# Altium PCB main.PcbDoc (part 5 of 8)
Units mil, origin at the board's own origin, x right, y up, seen from the top; angles counter-clockwise.
Board outline 3385.83 x 2362.2 mil, 8 copper layers (L1 (SIG), L2 (GND), L3 (SIG), L4 (GND), L5 (PWR), L6 (SIG), L7 (GND), L8 (SIG)), stack 46.958 mil thick; 318 components, 288 nets, 1482 pads, 1056 vias.
Unrouted connection lines stored in the file: 7.
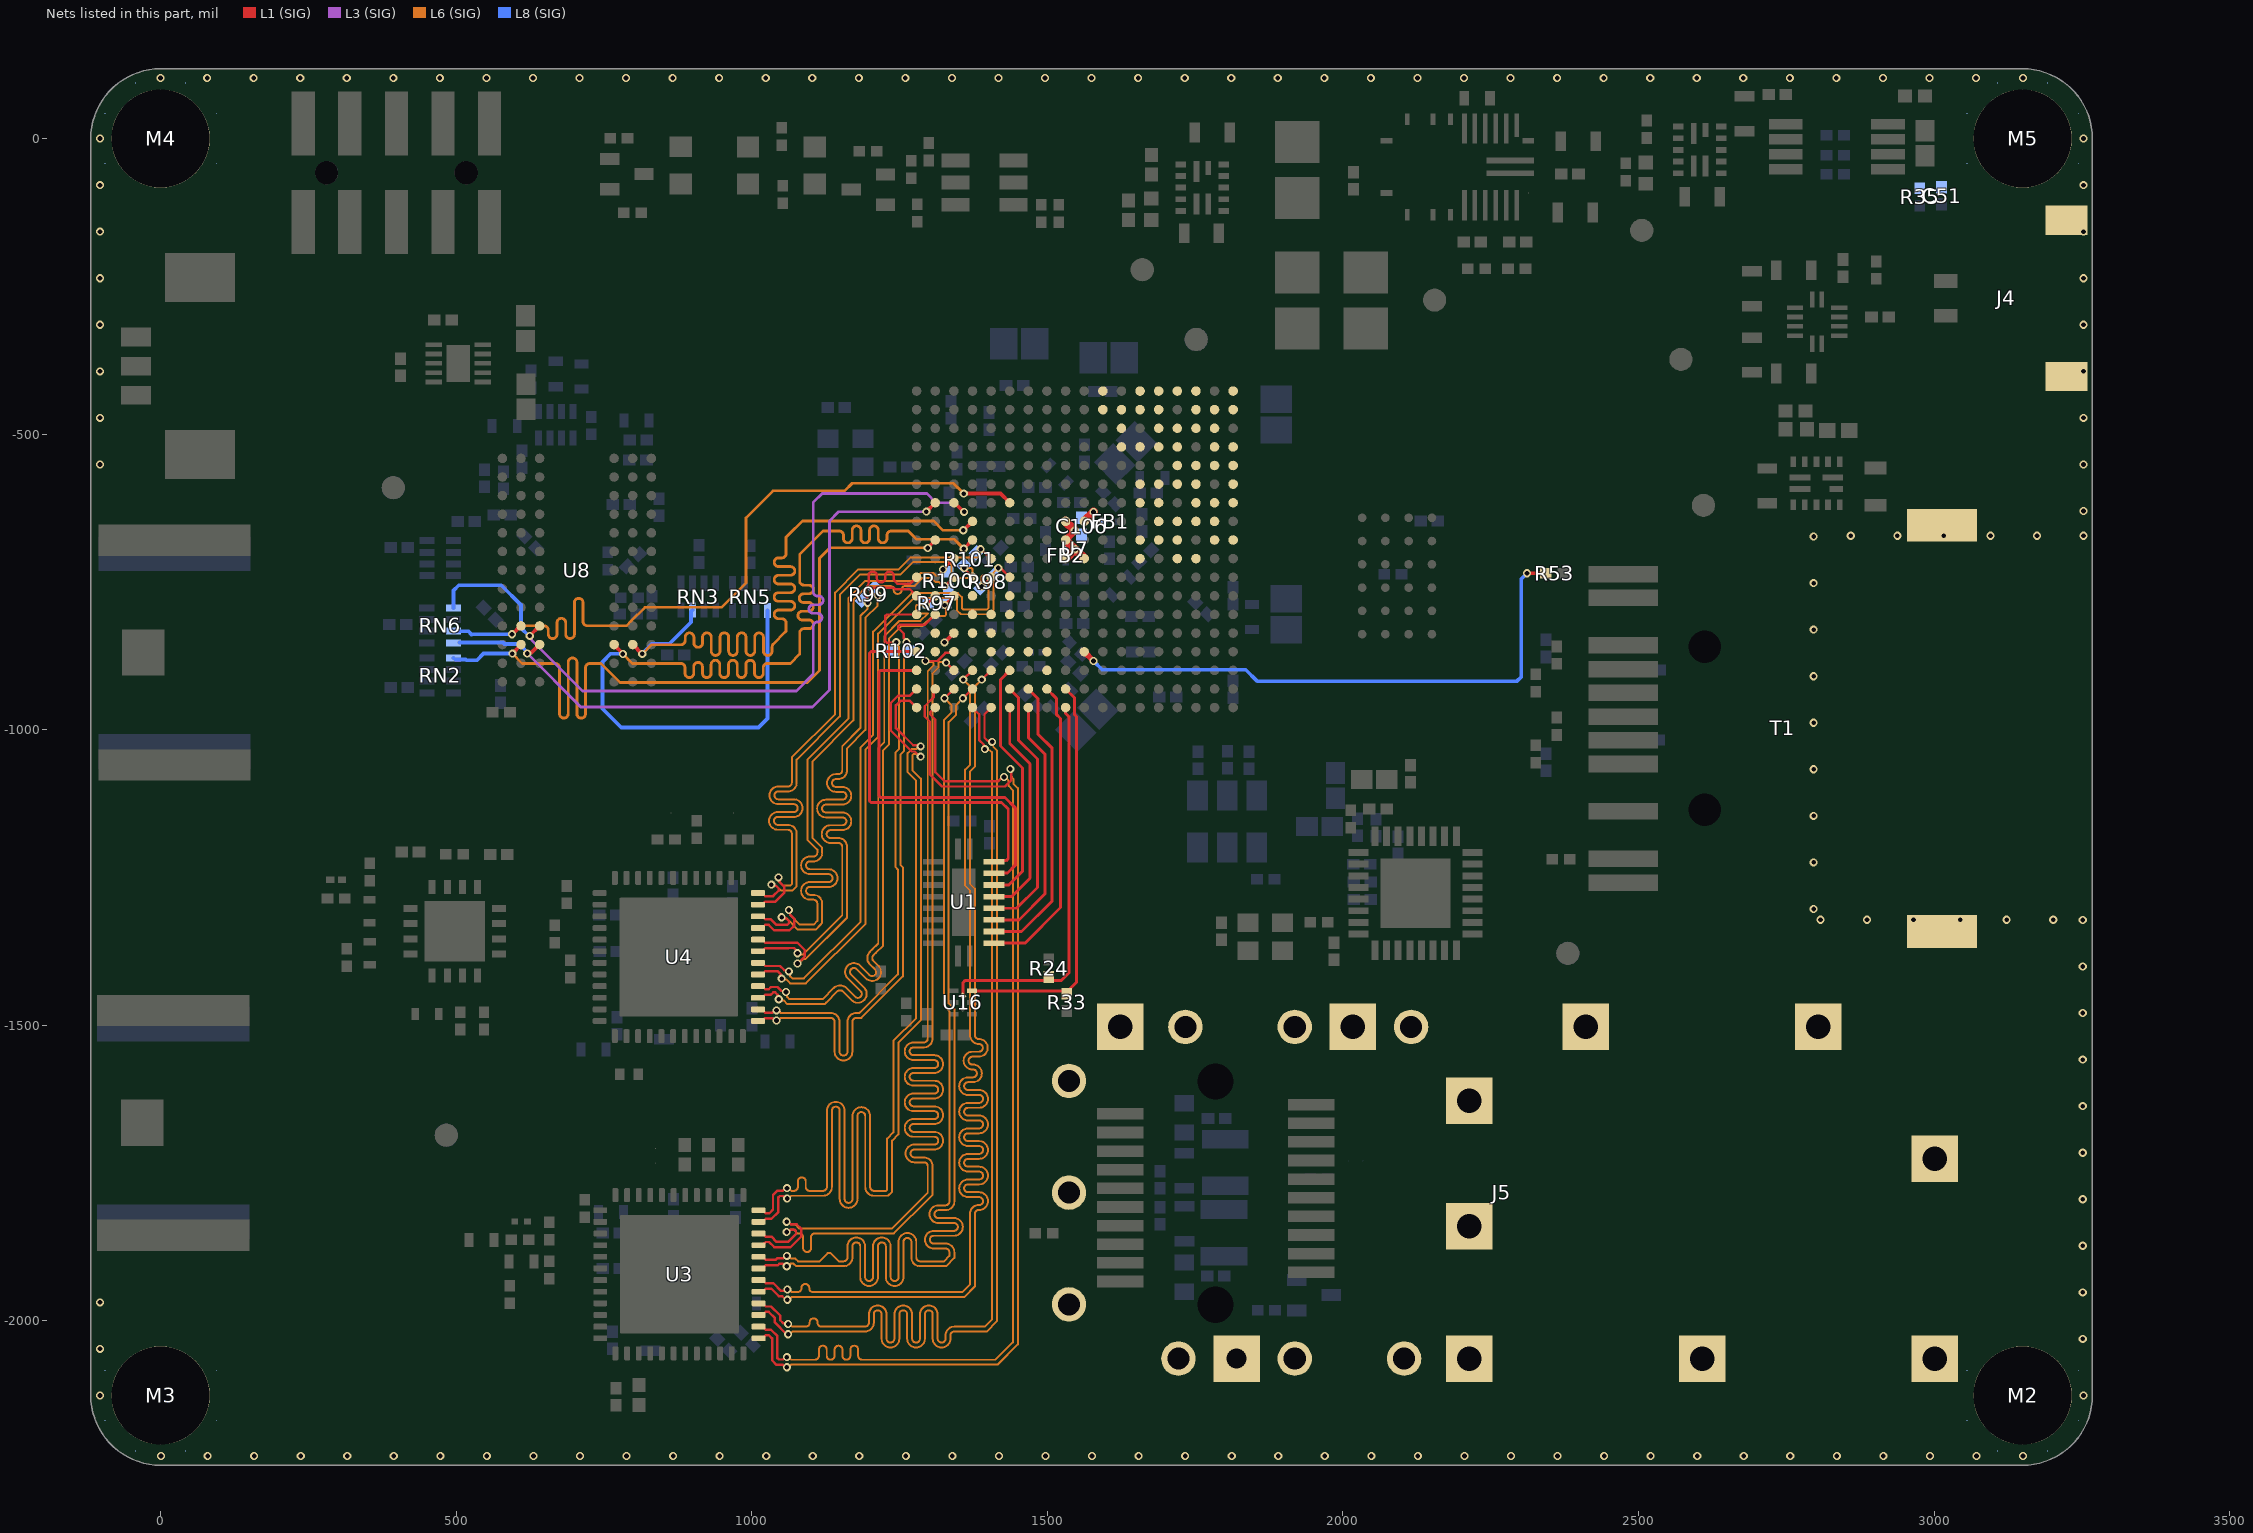
[diagram p9: the nets of this part, all layers, seen from the top]

## Via types
v1: diameter 13.78, hole 7.87, L1 (SIG) to L8 (SIG), tented both sides, 1033 vias
v2: diameter 13.78, hole 7.87, L1 (SIG) to L8 (SIG), 23 vias

## Nets (pads, with @x,y where several pads share a name; then routed paths per layer and width w, separated by ;. In a path a pad name is that pad's centre, name@x,y a point inside that pad or via, vN(x,y) a via of type N, cw(c..) or ccw(c..) an arc to the next point about the centre after c; other vN are vias at no path point) (continued)
AGND: C106.2 FB2.2 U7.H9 U7.J9 U7.K9 U7.K10 | length 112.5
  L1 (SIG) w12: U7.J9@1530.85,-679.01 1546.06,-663.8 1546.06,-662.56 v1@1545.95,-662.45
  L1 (SIG) w15: U7.H9@1530.6,-647.01 v1@1546.4,-662.8 ; U7.J9@1530.82,-679.23 1531.37,-679.23 1546.82,-694.67 v1(1546.93,-694.67) ; U7.K9@1530.85,-710.51 v1@1546.8,-694.58 ; v1@1546.87,-694.73 1562.34,-710.2 U7.K10@1562.34,-710.51
  other v1: 1546.4,-662.95
AVCC: C106.1 FB1.2 U7.H10 | length 22.3
  L1 (SIG) w15: U7.H10@1562.34,-647.52 v1(1578.09,-631.77)
B14_25: R53.1 U7.R10 | length 967.7
  L1 (SIG) w6: v1@2313.11,-733.86 2314.49,-735.25 2338.04,-735.25 R53.1@2338.14,-735.35
  L1 (SIG) w10: U7.R10@1562.34,-867.99 v1(1578.09,-883.74)
  L8 (SIG) w6: v1(1578.09,-883.74) 1592.95,-898.6 1835.65,-898.6 1854.7,-917.65 2294.4,-917.65 2301.92,-910.13 2301.92,-744.66 v1(2311.34,-735.25)
B15_0: U7.G13
B15_25: U7.K16
B15_L1_N: U7.C14
B15_L1_P: U7.D14
B15_L2_N: U7.B14
B15_L2_P: U7.B13
B15_L3_N: U7.B12
B15_L3_P: U7.C12
B15_L4_N: U7.A11
B15_L4_P: U7.B11
B15_L5_N: U7.F14
B15_L5_P: U7.F13
B15_L6_N: U7.D13 | length 0.2
  L1 (SIG) w10: U7.D13@1656.83,-521.53 U7.D13@1657.04,-521.53
B15_L6_P: U7.D12
B15_L7_N: U7.B17
B15_L7_P: U7.B16
B15_L8_N: U7.A16
B15_L8_P: U7.A15
B15_L9_N: U7.A14
B15_L9_P: U7.A13
B15_L10_N: U7.A18
B15_L10_P: U7.B18
B15_L11_N: U7.E16
B15_L11_P: U7.E15
B15_L12_N: U7.C15
B15_L12_P: U7.D15
B15_L13_N: U7.G16
B15_L13_P: U7.H16
B15_L14_N: U7.F16
B15_L14_P: U7.F15
B15_L15_N: U7.G14
B15_L15_P: U7.H14
B15_L16_N: U7.D17
B15_L16_P: U7.E17
B15_L17_N: U7.J13
B15_L17_P: U7.K13
B15_L18_N: U7.G17
B15_L18_P: U7.H17
B15_L19_N: U7.H15
B15_L19_P: U7.J14
B15_L20_N: U7.C17
B15_L20_P: U7.C16
B15_L21_N: U7.D18
B15_L21_P: U7.E18
B15_L22_N: U7.F18
B15_L22_P: U7.G18
B15_L23_N: U7.J18
B15_L23_P: U7.J17
B15_L24_N: U7.J15
B15_L24_P: U7.K15
B34_0: U7.K6
B34_25: U1.12 U7.U8 | length 516.6
  L1 (SIG) w5: U1.12@1409.93,-1360.98 1462.09,-1360.98 1522.28,-1300.8 1522.28,-980.99 1515.17,-973.88 1515.17,-946.8 U7.U8@1499.35,-930.98
B34_L1_N: R99.1 U4.44 U7.M1 | length 1078.2
  L1 (SIG) w4.11: U4.44@1010.54,-1354.91 1017.43,-1354.91 1020.3,-1357.78 1022.7,-1360.2 1058.03,-1360.2 1058.2,-1360.04 1077.05,-1360.04 1089.89,-1372.87 1089.89,-1383.18 1077.76,-1395.31 v1(1077.45,-1395.31) ; v1(1213.32,-772.78) 1212.41,-771.87 1203.99,-771.87 1200.88,-768.76 1200.88,-765.36 1206.51,-759.73 1240.3,-759.73 1242.87,-762.3 1267.68,-762.3 U7.M1@1278.88,-773.5
  L6 (SIG) w3.3: v1(1077.45,-1395.31) 1079.74,-1395.31 1086.97,-1388.08 1090.79,-1388.08 1161.33,-1317.54 1161.33,-1203.84 1161.33,-1198.04 ccw(c1146.38,-1198.04) 1146.38,-1183.09 1133.34,-1183.09 cw(c1133.34,-1176.44) 1126.69,-1176.44 cw(c1133.34,-1176.44) 1133.34,-1169.79 1153.33,-1169.79 ccw(c1153.33,-1154.84) 1168.28,-1154.84 ccw(c1153.33,-1154.84) 1153.33,-1139.89 1125.5,-1139.89 cw(c1125.5,-1133.25) 1118.85,-1133.25 cw(c1125.5,-1133.24) 1125.5,-1126.6 1153.33,-1126.6 ccw(c1153.33,-1111.65) 1168.28,-1111.65 ccw(c1153.33,-1111.65) 1153.33,-1096.7 1142.4,-1096.7 cw(c1142.4,-1090.05) 1135.75,-1090.05 cw(c1142.4,-1090.05) 1142.4,-1083.4 1146.38,-1083.4 ccw(c1146.38,-1068.45) 1161.33,-1068.45 1161.33,-1033.39 1161.33,-1031.24 1192.25,-1000.32 1192.25,-810.42 1212.79,-789.88 1212.79,-773.31 v1(1213.32,-772.78)
B34_L1_P: R99.2 U4.43 U7.L1 | length 1079.1
  L1 (SIG) w4.11: U4.43@1010.54,-1374.6 1017.43,-1374.6 U4.43@1020.3,-1371.73 ; U4.43@1020.3,-1371.71 1022.7,-1369.31 1061.8,-1369.31 1061.97,-1369.14 1071.28,-1369.14 1073.68,-1371.55 1073.68,-1371.65 1077.45,-1375.41 v1(1077.45,-1378.03) ; v1(1196.04,-785.22) 1195.13,-784.31 1195.13,-775.89 1191.77,-772.53 1191.77,-761.59 1192.02,-761.34 1194.09,-759.27 ccw(c1185.56,-750.77) 1197.6,-750.77 1197.6,-739.55 cw(c1204.65,-739.55) 1211.71,-739.55 1211.71,-743.57 ccw(c1218.76,-743.57) 1225.81,-743.57 1225.81,-739.55 cw(c1232.86,-739.55) 1239.92,-739.55 1239.92,-743.55 ccw(c1246.97,-743.55) 1241.98,-748.54 1246.64,-753.2 1267.68,-753.2 1271,-749.88 U7.L1@1278.88,-742
  L6 (SIG) w3.3: v1(1077.45,-1378.03) 1079.2,-1379.78 1087.35,-1379.78 1153.03,-1314.11 1153.03,-1203.84 1153.03,-1198.04 ccw(c1146.38,-1198.04) 1146.38,-1191.39 1133.34,-1191.39 cw(c1133.34,-1176.44) 1118.39,-1176.44 cw(c1133.34,-1176.44) 1133.34,-1161.49 1153.33,-1161.49 ccw(c1153.33,-1154.84) 1159.98,-1154.84 ccw(c1153.33,-1154.84) 1153.33,-1148.19 1125.5,-1148.19 cw(c1125.5,-1133.25) 1110.55,-1133.25 cw(c1125.5,-1133.24) 1125.5,-1118.3 1153.33,-1118.3 ccw(c1153.33,-1111.65) 1159.98,-1111.65 ccw(c1153.33,-1111.65) 1153.33,-1105 1142.4,-1105 cw(c1142.4,-1090.05) 1127.45,-1090.05 cw(c1142.4,-1090.05) 1142.4,-1075.1 1146.38,-1075.1 ccw(c1146.38,-1068.45) 1153.03,-1068.45 1153.03,-1033.39 1153.03,-1027.8 1183.95,-996.89 1183.95,-806.99 1195.8,-795.13 1195.8,-785.46 v1(1196.04,-785.22)
B34_L2_N: R100.2 U4.46 U7.L3 | length 1079.6
  L1 (SIG) w4.11: U4.46@1010.54,-1315.54 1017.43,-1315.54 U4.46@1020.3,-1318.41 ; U4.46@1020.3,-1318.43 1022.7,-1320.83 1032.28,-1320.83 1041.56,-1330.12 1060.04,-1330.12 1063.02,-1327.13 1063.02,-1323.73 1058.21,-1318.92 1052.43,-1318.92 v1(1050.58,-1317.07) ; v1(1326.12,-756.87) 1326.56,-756.87 1341.43,-742 U7.L3@1341.87,-742
  L6 (SIG) w3.3: v1(1050.58,-1317.07) 1052.48,-1318.97 1058.83,-1318.97 1077.77,-1337.91 1107.95,-1337.91 1116.25,-1329.6 1119.19,-1326.67 1119.19,-1294.13 ccw(c1104.24,-1294.13) 1104.24,-1279.18 1098.46,-1279.18 cw(c1098.46,-1272.53) 1091.81,-1272.53 cw(c1098.46,-1272.53) 1098.46,-1265.88 1130.02,-1265.88 ccw(c1130.02,-1250.93) 1144.97,-1250.93 ccw(c1130.02,-1250.93) 1130.02,-1235.98 1098.46,-1235.98 cw(c1098.46,-1229.33) 1091.81,-1229.33 cw(c1098.46,-1229.33) 1098.46,-1222.68 1104.24,-1222.68 ccw(c1104.24,-1207.73) 1119.19,-1207.73 1119.19,-1199.38 1105.54,-1185.73 1102.44,-1182.62 1102.44,-1053.81 1171.98,-984.27 1171.98,-780.28 1195.72,-756.54 1218.49,-756.54 1233.44,-756.54 cw(c1233.44,-763.19) 1240.09,-763.19 1240.09,-763.61 ccw(c1246.74,-763.61) 1246.74,-770.26 ccw(c1246.74,-763.61) 1253.39,-763.61 1253.39,-763.19 cw(c1260.04,-763.19) 1260.04,-756.54 1269.42,-756.54 1275.82,-756.54 1289.24,-743.13 1303.81,-743.13 1310.65,-749.97 1316.38,-749.97 1323.29,-756.87 v1(1326.12,-756.87)
B34_L2_P: R100.1 U4.45 U7.K3 | length 1081.8
  L1 (SIG) w4.11: U4.45@1010.54,-1335.23 1017.43,-1335.23 1020.3,-1332.36 1022.7,-1329.94 1028.51,-1329.94 1037.79,-1339.22 1063.81,-1339.22 1072.13,-1330.9 1072.13,-1319.96 1064.65,-1312.48 1064.65,-1306.7 v1(1062.8,-1304.85) ; v1(1323.43,-728.95) U7.K3@1341.87,-710.51
  L6 (SIG) w3.3: v1(1062.8,-1304.85) 1064.69,-1306.75 1064.69,-1313.1 1081.2,-1329.61 1104.51,-1329.61 1110.89,-1323.23 1110.89,-1294.13 ccw(c1104.24,-1294.13) 1104.24,-1287.48 1098.46,-1287.48 cw(c1098.46,-1272.53) 1083.51,-1272.53 cw(c1098.46,-1272.53) 1098.46,-1257.58 1130.02,-1257.58 ccw(c1130.02,-1250.93) 1136.67,-1250.93 ccw(c1130.02,-1250.93) 1130.02,-1244.28 1098.46,-1244.28 cw(c1098.46,-1229.33) 1083.51,-1229.33 cw(c1098.46,-1229.33) 1098.46,-1214.38 1104.24,-1214.38 ccw(c1104.24,-1207.73) 1110.89,-1207.73 1110.89,-1202.81 1094.14,-1186.06 1094.14,-1185.73 1094.14,-1050.38 1163.68,-980.83 1163.68,-776.85 1192.28,-748.25 1272.39,-748.25 1285.8,-734.83 1307.25,-734.83 1311.62,-739.2 1314.36,-739.2 1323.43,-730.13 v1(1323.43,-728.95)
B34_L3_N: R102.1 U4.38 U7.N1 | length 1077.7
  L1 (SIG) w4.11: U4.38@1010.54,-1473.02 1017.43,-1473.02 1020.3,-1475.89 1023.09,-1478.71 1035.06,-1478.71 1039.15,-1474.62 v1(1041.76,-1474.62) ; v1@1242.7,-852.48 1242.4,-852.78 1228.52,-852.78 1226.11,-850.37 1226.11,-807.4 1228.52,-805 U7.N1@1278.88,-805
  L6 (SIG) w3.3: v1(1041.76,-1474.62) 1044.45,-1474.62 1048.94,-1479.11 1088.28,-1479.11 1133.57,-1479.11 cw(c1133.57,-1494.06) 1148.52,-1494.06 1148.52,-1544.63 ccw(c1155.17,-1544.63) 1155.17,-1551.28 ccw(c1155.17,-1544.63) 1161.82,-1544.63 1161.82,-1494.06 cw(c1176.77,-1494.06) 1176.77,-1479.11 1181.82,-1479.11 1182.57,-1478.36 1247.27,-1413.66 1247.27,-1236.38 1243,-1232.12 1243,-1038.61 1248.92,-1032.69 1248.92,-859.21 1244.43,-854.72 v1(1244.43,-852.04)
B34_L3_P: R102.2 U4.37 U7.N2 | length 1080.4
  L1 (SIG) w4.11: U4.37@1010.54,-1492.71 1017.43,-1492.71 1022.33,-1487.81 1035.06,-1487.81 1039.15,-1491.9 v1(1041.76,-1491.9) ; v1(1261.71,-852.04) 1261.71,-849.42 1257.37,-845.08 1257.37,-837.62 1247.85,-828.1 1247.85,-824.7 1250.25,-822.3 1293.07,-822.3 U7.N2@1310.37,-805
  L6 (SIG) w3.3: v1(1041.76,-1491.9) 1044.45,-1491.9 1048.94,-1487.41 1088.28,-1487.41 1133.57,-1487.41 cw(c1133.57,-1494.06) 1140.22,-1494.06 1140.22,-1544.63 ccw(c1155.17,-1544.63) 1155.17,-1559.58 ccw(c1155.17,-1544.63) 1170.12,-1544.63 1170.12,-1494.06 cw(c1176.77,-1494.06) 1176.77,-1487.41 1182.57,-1487.41 1185.26,-1487.41 1255.57,-1417.1 1255.57,-1232.95 1251.3,-1228.68 1251.3,-1042.05 1257.22,-1036.13 1257.22,-859.21 1261.71,-854.72 v1(1261.71,-852.04)
B34_L4_N: R97.1 U4.40 U7.M2 | length 1078.4
  L1 (SIG) w4.11: U4.40@1010.54,-1433.65 1017.43,-1433.65 1020.3,-1436.52 1022.7,-1438.94 1028.68,-1438.94 1032.5,-1435.13 1043.5,-1435.13 1050.22,-1441.85 1056,-1441.85 v1(1057.85,-1443.7) ; v1(1294.95,-789.25) 1294.95,-789.08 1310.37,-773.66 U7.M2@1310.37,-773.5
  L6 (SIG) w3.3: v1(1057.85,-1443.7) 1059.75,-1445.6 1059.75,-1451.95 1063.54,-1455.74 1119.76,-1455.74 1138.78,-1436.72 cw(c1149.35,-1447.29) 1158.54,-1435.5 1158.7,-1435.5 1159.9,-1436.7 1174.75,-1451.55 ccw(c1179.45,-1446.85) 1184.15,-1451.55 ccw(c1179.45,-1446.85) 1184.15,-1442.15 1162.25,-1420.24 cw(c1172.82,-1409.67) 1162.22,-1399.14 1162.29,-1399.07 cw(c1172.82,-1409.67) 1183.39,-1399.1 1199.07,-1414.77 ccw(c1203.77,-1410.07) 1208.47,-1414.77 ccw(c1203.77,-1410.07) 1208.47,-1405.37 1199.87,-1396.77 cw(c1210.44,-1386.2) 1199.87,-1375.63 1203.97,-1371.53 1213.96,-1361.54 1213.96,-1031.33 1224.09,-1021.2 1224.09,-841.78 1249.92,-815.95 1285.28,-815.95 1297.81,-803.42 1279.3,-803.42 1277.37,-801.49 1277.37,-790.78 1279.3,-788.85 1293.01,-788.85 v1@1293.13,-788.72
B34_L4_P: R97.2 U4.39 U7.M3 | length 1079.6
  L1 (SIG) w4.11: U4.39@1010.54,-1453.34 1017.43,-1453.34 1020.3,-1450.47 1022.7,-1448.05 1032.45,-1448.05 1036.27,-1444.23 1039.73,-1444.23 1043.78,-1448.29 1043.78,-1454.07 v1(1045.63,-1455.92) ; v1(1326.32,-789.25) 1326.32,-789.15 1341.87,-773.6 U7.M3@1341.87,-773.5
  L6 (SIG) w3.3: v1(1045.63,-1455.92) 1047.53,-1457.82 1053.88,-1457.82 1060.1,-1464.04 1123.19,-1464.04 1125.63,-1461.6 1144.65,-1442.59 cw(c1149.35,-1447.29) 1154.07,-1442.6 1168.88,-1457.42 ccw(c1179.45,-1446.85) 1189.99,-1457.45 1190.06,-1457.38 ccw(c1179.45,-1446.85) 1190.02,-1436.28 1168.12,-1414.37 cw(c1172.82,-1409.67) 1168.12,-1404.97 cw(c1172.82,-1409.67) 1177.52,-1404.97 1193.2,-1420.64 ccw(c1203.77,-1410.07) 1214.3,-1420.68 1214.37,-1420.61 ccw(c1203.77,-1410.07) 1214.34,-1399.5 1205.74,-1390.9 cw(c1210.44,-1386.2) 1205.74,-1381.5 1209.84,-1377.39 1222.26,-1364.97 1222.26,-1034.77 1232.39,-1024.64 1232.39,-845.21 1253.36,-824.24 1288.72,-824.24 1305.75,-807.22 1326.76,-807.22 1328.69,-805.28 1328.69,-796.42 1328.33,-796.06 1328.33,-789.33 v1@1327.78,-788.78
B34_L5_N: R101.2 U4.48 U7.L4 | length 1081.5
  L1 (SIG) w4.11: U4.48@1010.54,-1276.17 1017.43,-1276.17 1020.3,-1279.04 1022.7,-1281.46 1036.12,-1281.46 1045.54,-1272.05 1045.54,-1268.65 1040.73,-1263.84 1034.94,-1263.84 v1(1033.09,-1261.99) ; v1(1359.54,-726.5) 1359.54,-727.34 1373.37,-741.17 U7.L4@1373.37,-742
  L6 (SIG) w3.3: v1(1033.09,-1261.99) 1034.99,-1263.88 1041.34,-1263.88 1049.05,-1271.59 1069.25,-1271.59 1076.04,-1264.8 1076.04,-1181.56 1076.04,-1175.76 ccw(c1061.09,-1175.76) 1061.09,-1160.81 1044.22,-1160.81 cw(c1044.22,-1154.16) 1037.57,-1154.16 cw(c1044.22,-1154.16) 1044.22,-1147.51 1071.09,-1147.51 ccw(c1071.09,-1132.56) 1086.04,-1132.56 ccw(c1071.09,-1132.56) 1071.09,-1117.61 1044.95,-1117.61 cw(c1044.95,-1110.96) 1038.3,-1110.96 cw(c1044.95,-1110.96) 1044.95,-1104.31 1061.09,-1104.31 ccw(c1061.09,-1089.36) 1076.04,-1089.36 1076.04,-1053.43 1076.04,-1050.33 1149.15,-977.22 1149.15,-771.35 1183.06,-737.43 1251.57,-737.43 1272.44,-716.57 1333.73,-716.57 1337.84,-720.68 1337.84,-734.9 1346.43,-743.49 1366.25,-743.49 1373.02,-736.72 1373.02,-728.12 1371.09,-726.18 1359.71,-726.18 v1@1359.55,-726.35
B34_L5_P: R101.1 U4.47 U7.K5 | length 1079.9
  L1 (SIG) w4.11: U4.47@1010.54,-1295.86 1017.43,-1295.86 1020.3,-1292.99 1022.7,-1290.57 1039.89,-1290.57 1054.64,-1275.82 1054.64,-1264.88 1047.16,-1257.4 1047.16,-1251.62 v1(1045.31,-1249.77) ; v1(1387.2,-694.67) 1388.12,-694.67 1403.95,-710.51 U7.K5@1404.86,-710.51
  L6 (SIG) w3.3: v1(1045.31,-1249.77) 1047.21,-1251.67 1047.21,-1258.02 1052.49,-1263.29 1065.81,-1263.29 1067.74,-1261.36 1067.74,-1181.56 1067.74,-1175.76 ccw(c1061.09,-1175.76) 1061.09,-1169.11 1044.22,-1169.11 cw(c1044.22,-1154.16) 1029.27,-1154.16 cw(c1044.22,-1154.16) 1044.22,-1139.21 1071.09,-1139.21 ccw(c1071.09,-1132.56) 1077.74,-1132.56 ccw(c1071.09,-1132.56) 1071.09,-1125.91 1044.95,-1125.91 cw(c1044.95,-1110.96) 1030,-1110.96 cw(c1044.95,-1110.96) 1044.95,-1096.01 1061.09,-1096.01 ccw(c1061.09,-1089.36) 1067.74,-1089.36 1067.74,-1053.43 1067.74,-1046.89 1140.85,-973.78 1140.85,-767.91 1179.63,-729.14 1248.13,-729.14 1269,-708.27 1342.98,-708.27 1382.17,-708.27 1386.41,-704.02 1386.41,-695.47 v1(1387.2,-694.67)
B34_L6_N: R98.1 U4.42 U7.L5 | length 1077.5
  L1 (SIG) w4.11: U4.42@1010.54,-1394.28 1017.43,-1394.28 1020.3,-1397.15 1022.7,-1399.57 1047.92,-1399.57 1055.16,-1406.81 1060.94,-1406.81 v1(1062.8,-1408.67) ; v1(1389.11,-757.75) U7.L5@1404.86,-742
  L6 (SIG) w3.3: v1(1062.8,-1408.67) 1064.69,-1410.56 1064.69,-1416.91 1068.49,-1420.71 1088.09,-1420.71 1184.13,-1324.66 1184.13,-1029.9 1205.32,-1008.71 1205.32,-834.04 1270.45,-768.91 1348.63,-768.91 1355.42,-775.7 1355.42,-794.36 1356.64,-795.58 1357.35,-796.3 1393.4,-796.3 1398.34,-796.3 1400.27,-794.36 1400.27,-742 1396.85,-738.58 1390.85,-738.58 1388.92,-740.51 1388.92,-756.16 v1@1388.07,-757.01
B34_L6_P: R98.2 U4.41 U7.L6 | length 1083
  L1 (SIG) w4.11: U4.41@1010.54,-1413.97 1017.43,-1413.97 1020.3,-1411.1 1022.7,-1408.68 1044.15,-1408.68 1048.73,-1413.25 1048.73,-1419.03 v1(1050.58,-1420.88) ; v1(1416.97,-726.28) 1418.83,-728.13 1422.49,-728.13 U7.L6@1436.36,-742
  L6 (SIG) w3.3: v1(1050.58,-1420.88) 1052.47,-1422.78 1058.82,-1422.78 1065.05,-1429 1091.53,-1429 1192.43,-1328.1 1192.43,-1033.34 1213.62,-1012.15 1213.62,-837.48 1273.89,-777.21 1345.19,-777.21 1347.12,-779.14 1347.12,-797.8 1353.92,-804.6 1401.78,-804.6 1408.57,-797.8 1408.57,-734.69 v1(1416.97,-726.28)
B34_L7_N: U3.48 U7.V1 | length 1803.7
  L1 (SIG) w4.11: U3.48@1011.46,-1812.75 1018.35,-1812.75 U3.48@1021.22,-1815.62 ; U3.48@1021.22,-1815.63 1023.62,-1818.04 1029.6,-1818.04 1035.88,-1811.76 1035.88,-1787.25 1043.62,-1779.51 1052.89,-1779.51 1057.06,-1775.35 v1(1059.68,-1775.35) ; U7.V1@1278.88,-962.48 1267.68,-951.28 1251.45,-951.28 1243.87,-958.85 1243.87,-997.13 1273.04,-1026.3 1283.75,-1026.3 v1(1285.6,-1028.15)
  L6 (SIG) w3.3: v1(1059.68,-1775.35) 1062.28,-1775.35 1066.85,-1779.91 1069.68,-1779.91 1071.33,-1779.91 ccw(c1071.33,-1773.26) 1077.98,-1773.26 1077.98,-1763.8 cw(c1084.63,-1763.8) 1084.63,-1757.15 cw(c1084.63,-1763.8) 1091.28,-1763.8 1091.28,-1773.26 ccw(c1097.93,-1773.26) 1097.93,-1779.91 1112.37,-1779.91 1114.02,-1779.91 1114.72,-1779.91 1120.52,-1779.91 ccw(c1120.52,-1773.26) 1127.17,-1773.26 1127.17,-1644.27 cw(c1142.12,-1644.27) 1142.12,-1629.32 cw(c1142.12,-1644.27) 1157.07,-1644.27 1157.07,-1793.67 ccw(c1163.72,-1793.67) 1163.72,-1800.32 ccw(c1163.72,-1793.67) 1170.37,-1793.67 1170.37,-1653.34 cw(c1185.31,-1653.34) 1185.31,-1638.39 cw(c1185.31,-1653.34) 1200.26,-1653.34 1200.26,-1773.26 ccw(c1206.91,-1773.26) 1206.91,-1779.91 1227.03,-1779.91 1228.32,-1778.62 1228.96,-1777.98 1228.96,-1691.48 1239.53,-1680.91 1239.53,-1526.23 1277.91,-1487.86 1277.91,-1086.13 1263.53,-1071.74 1263.53,-1039.44 1270.32,-1032.64 1278.42,-1032.64 1282.91,-1028.15 v1(1285.6,-1028.15)
B34_L7_P: U3.47 U7.U1 | length 1803.1
  L1 (SIG) w4.11: U3.47@1011.46,-1832.43 1018.35,-1832.43 1021.22,-1829.57 1023.62,-1827.14 1033.37,-1827.14 1044.99,-1815.53 1044.99,-1791.02 1047.39,-1788.62 1053.05,-1788.62 1057.22,-1792.78 v1(1059.84,-1792.78) ; U7.U1@1278.88,-930.98 1267.68,-942.18 1247.67,-942.18 1234.77,-955.08 1234.77,-1000.9 1270.68,-1036.81 1275.77,-1036.81 1284.39,-1045.43 v1(1285.6,-1045.43)
  L6 (SIG) w3.3: v1(1059.84,-1792.78) 1062.44,-1792.78 1067.01,-1788.21 1107.43,-1788.21 1114.72,-1788.21 1120.52,-1788.21 ccw(c1120.52,-1773.26) 1135.47,-1773.26 1135.47,-1644.27 cw(c1142.12,-1644.27) 1142.12,-1637.62 cw(c1142.12,-1644.27) 1148.77,-1644.27 1148.77,-1793.67 ccw(c1163.72,-1793.67) 1163.72,-1808.62 ccw(c1163.72,-1793.67) 1178.67,-1793.67 1178.67,-1653.34 cw(c1185.31,-1653.34) 1185.31,-1646.69 cw(c1185.31,-1653.34) 1191.96,-1653.34 1191.96,-1773.26 ccw(c1206.91,-1773.26) 1206.91,-1788.21 1228.32,-1788.21 1230.46,-1788.21 1237.26,-1781.42 1237.26,-1694.92 1247.83,-1684.34 1247.83,-1529.67 1286.21,-1491.29 1286.21,-1082.69 1271.82,-1068.31 1271.82,-1042.88 1273.76,-1040.94 1278.42,-1040.94 1282.91,-1045.43 v1(1285.6,-1045.43)
B34_L8_N: U3.44 U7.U3 | length 1802.8
  L1 (SIG) w4.11: U3.44@1011.46,-1891.49 1018.35,-1891.49 U3.44@1021.22,-1894.36 ; U3.44@1021.22,-1894.37 1023.62,-1896.78 1040.31,-1896.78 1042.99,-1894.1 1052.59,-1894.1 1056.76,-1889.93 v1(1059.38,-1889.93) ; v1(1326.12,-946.73) U7.U3@1341.87,-930.98
  L6 (SIG) w3.3: v1(1059.38,-1889.93) 1061.98,-1889.93 1066.55,-1894.51 1073.84,-1894.51 1078.46,-1899.12 1114.67,-1899.12 1128.38,-1885.41 1133.54,-1885.41 1147.25,-1899.12 1149.46,-1899.12 1152.9,-1899.12 1155.26,-1899.12 ccw(c1155.26,-1892.47) 1161.91,-1892.47 1161.91,-1873.73 cw(c1176.86,-1873.73) 1176.86,-1858.78 cw(c1176.86,-1873.73) 1191.81,-1873.73 1191.81,-1925.79 ccw(c1198.46,-1925.79) 1198.46,-1932.43 ccw(c1198.46,-1925.79) 1205.11,-1925.79 1205.11,-1873.73 cw(c1220.06,-1873.73) 1220.06,-1858.78 cw(c1220.06,-1873.73) 1235.01,-1873.73 1235.01,-1925.79 ccw(c1241.65,-1925.79) 1241.65,-1932.43 ccw(c1241.65,-1925.79) 1248.3,-1925.79 1248.3,-1866.32 cw(c1263.25,-1866.32) 1263.25,-1851.37 cw(c1263.25,-1866.32) 1278.2,-1866.32 1278.2,-1892.47 ccw(c1284.85,-1892.47) 1284.85,-1899.12 1317.87,-1899.12 1325.35,-1899.12 1334.42,-1890.05 1334.42,-1889.93 1334.42,-1884.13 ccw(c1327.77,-1884.13) 1327.77,-1877.48 1307.88,-1877.48 cw(c1307.88,-1862.54) 1292.93,-1862.54 cw(c1307.88,-1862.54) 1307.88,-1847.59 1342.05,-1847.59 ccw(c1342.05,-1840.94) 1348.7,-1840.94 ccw(c1342.05,-1840.94) 1342.05,-1834.29 1315.67,-1834.29 cw(c1315.67,-1819.34) 1300.72,-1819.34 cw(c1315.67,-1819.34) 1315.67,-1804.39 1327.77,-1804.39 ccw(c1327.77,-1797.74) 1334.42,-1797.74 1334.42,-1745.69 1334.42,-1475.95 1324.82,-1466.35 1324.82,-983.74 1337.5,-971.06 1337.5,-958.11 v1(1326.12,-946.73)
B34_L8_P: U3.43 U7.U4 | length 1805.7
  L1 (SIG) w4.11: U3.43@1011.46,-1911.17 1018.35,-1911.17 1021.22,-1908.31 1023.62,-1905.88 1044.08,-1905.88 1046.76,-1903.21 1052.41,-1903.21 1056.58,-1907.38 v1(1059.2,-1907.38) ; v1(1357.18,-946.73) 1357.4,-946.73 1373.14,-930.98 U7.U4@1373.37,-930.98
  L6 (SIG) w3.3: v1(1059.2,-1907.38) 1061.8,-1907.38 1066.37,-1902.81 1070.41,-1902.81 1075.02,-1907.42 1149.46,-1907.42 1155.26,-1907.42 ccw(c1155.26,-1892.47) 1170.21,-1892.47 1170.21,-1873.73 cw(c1176.86,-1873.73) 1176.86,-1867.08 cw(c1176.86,-1873.73) 1183.51,-1873.73 1183.51,-1925.79 ccw(c1198.46,-1925.79) 1198.46,-1940.73 ccw(c1198.46,-1925.79) 1213.41,-1925.79 1213.41,-1873.73 cw(c1220.06,-1873.73) 1220.06,-1867.08 cw(c1220.06,-1873.73) 1226.71,-1873.73 1226.71,-1925.79 ccw(c1241.65,-1925.79) 1241.65,-1940.73 ccw(c1241.65,-1925.79) 1256.6,-1925.79 1256.6,-1866.32 cw(c1263.25,-1866.32) 1263.25,-1859.67 cw(c1263.25,-1866.32) 1269.9,-1866.32 1269.9,-1892.47 ccw(c1284.85,-1892.47) 1284.85,-1907.42 1317.87,-1907.42 1328.79,-1907.42 1342.72,-1893.49 1342.72,-1889.93 1342.72,-1884.13 ccw(c1327.77,-1884.13) 1327.77,-1869.19 1307.88,-1869.19 cw(c1307.88,-1862.54) 1301.23,-1862.54 cw(c1307.88,-1862.54) 1307.88,-1855.89 1342.05,-1855.89 ccw(c1342.05,-1840.94) 1357,-1840.94 ccw(c1342.05,-1840.94) 1342.05,-1825.99 1315.67,-1825.99 cw(c1315.67,-1819.34) 1309.02,-1819.34 cw(c1315.67,-1819.34) 1315.67,-1812.69 1327.77,-1812.69 ccw(c1327.77,-1797.74) 1342.72,-1797.74 1342.72,-1745.69 1342.72,-1472.51 1333.12,-1462.91 1333.12,-987.18 1345.8,-974.5 1345.8,-958.11 v1(1357.18,-946.73)
B34_L9_N: U3.38 U7.V2 | length 1804.8
  L1 (SIG) w4.11: U3.38@1011.46,-2009.6 1018.35,-2009.6 U3.38@1021.22,-2012.47 ; U3.38@1021.22,-2012.48 1023.62,-2014.89 1032.6,-2014.89 1043.46,-2025.76 1043.46,-2062.81 1045.87,-2065.22 1052.67,-2065.22 1056.76,-2061.13 v1(1059.38,-2061.13) ; U7.V2@1310.37,-962.48 1309.56,-962.48 1301.61,-970.43 1301.61,-973.83 1310.37,-982.6 1310.37,-1071.62 1325.57,-1086.82 1417.17,-1086.82 1424.11,-1079.88 v1(1426.73,-1079.88)
  L6 (SIG) w3.3: v1(1059.38,-2061.13) 1062.06,-2061.13 1066.55,-2065.62 1105.21,-2065.62 1106.86,-2065.62 ccw(c1106.86,-2058.97) 1113.51,-2058.97 1113.51,-2048.49 cw(c1120.16,-2048.49) 1120.16,-2041.84 cw(c1120.16,-2048.49) 1126.81,-2048.49 1126.81,-2058.97 ccw(c1133.46,-2058.97) 1133.46,-2065.62 ccw(c1133.46,-2058.97) 1140.11,-2058.97 1140.11,-2048.49 cw(c1146.76,-2048.49) 1146.76,-2041.84 cw(c1146.76,-2048.49) 1153.41,-2048.49 1153.41,-2058.97 ccw(c1160.06,-2058.97) 1160.06,-2065.62 ccw(c1160.06,-2058.97) 1166.71,-2058.97 1166.71,-2048.49 cw(c1173.36,-2048.49) 1173.36,-2041.84 cw(c1173.36,-2048.49) 1180,-2048.49 1180,-2058.97 ccw(c1186.65,-2058.97) 1186.65,-2065.62 1201.06,-2065.62 1412.22,-2065.62 1441.76,-2036.08 1441.76,-1102.32 1434.34,-1094.9 1434.34,-1086.29 1427.93,-1079.88 v1(1426.73,-1079.88)
B34_L9_P: U3.37 U7.U2 | length 1805.5
  L1 (SIG) w4.11: U3.37@1011.46,-2029.28 1018.35,-2029.28 1021.22,-2026.42 1023.62,-2023.99 1028.82,-2023.99 1034.36,-2029.53 1034.36,-2066.58 1042.1,-2074.32 1052.67,-2074.32 1056.76,-2078.41 v1(1059.38,-2078.41) ; U7.U2@1310.37,-930.98 1308.07,-933.28 1308.07,-944.75 1292.5,-960.32 1292.5,-977.6 1301.27,-986.37 1301.27,-1075.4 1321.8,-1095.93 1428.28,-1095.93 1439.17,-1085.03 1439.17,-1068.06 v1(1437.4,-1066.28)
  L6 (SIG) w3.3: v1(1059.38,-2078.41) 1062.06,-2078.41 1066.55,-2073.92 1125.12,-2073.92 1179.17,-2073.92 1415.65,-2073.92 1450.06,-2039.52 1450.06,-1979.47 1450.06,-1098.88 1442.64,-1091.46 1442.64,-1082.85 1438.77,-1078.98 1438.77,-1067.66 v1(1437.4,-1066.28)
B34_L10_N: U3.40 U7.V4 | length 1801.9
  L1 (SIG) w4.11: U3.40@1011.46,-1970.23 1018.35,-1970.23 1021.22,-1973.1 1023.62,-1975.52 1032.6,-1975.52 1048.17,-1991.09 1048.17,-1998.82 1052.88,-2003.54 1059.91,-2003.54 v1(1061.52,-2005.15) ; U7.V4@1373.37,-962.48 1384.56,-973.67 1384.56,-1017.2 1392.5,-1025.14 1392.5,-1030.92 v1(1394.35,-1032.77)
  L6 (SIG) w3.3: v1(1061.52,-2005.15) 1064.2,-2005.15 1068.69,-2009.64 1089.69,-2009.64 1091.35,-2009.64 ccw(c1091.35,-2002.99) 1097.99,-2002.99 1097.99,-2002.19 cw(c1104.64,-2002.19) 1104.64,-1995.54 cw(c1104.64,-2002.19) 1111.29,-2002.19 1111.29,-2002.99 ccw(c1117.94,-2002.99) 1117.94,-2009.64 1140.69,-2009.64 1185.65,-2009.64 1191.45,-2009.64 ccw(c1191.45,-2002.99) 1198.1,-2002.99 1198.1,-1988.68 cw(c1213.05,-1988.68) 1213.05,-1973.73 cw(c1213.05,-1988.68) 1227.99,-1988.68 1227.99,-2029.93 ccw(c1234.64,-2029.93) 1234.64,-2036.58 ccw(c1234.64,-2029.93) 1241.29,-2029.93 1241.29,-1988.68 cw(c1256.24,-1988.68) 1256.24,-1973.73 cw(c1256.24,-1988.68) 1271.19,-1988.68 1271.19,-2029.93 ccw(c1277.84,-2029.93) 1277.84,-2036.58 ccw(c1277.84,-2029.93) 1284.49,-2029.93 1284.49,-1988.68 cw(c1299.44,-1988.68) 1299.44,-1973.73 cw(c1299.44,-1988.68) 1314.39,-1988.68 1314.39,-2029.93 ccw(c1321.04,-2029.93) 1321.04,-2036.58 ccw(c1321.04,-2029.93) 1327.69,-2029.93 1327.69,-2024.59 cw(c1342.64,-2024.59) 1342.64,-2009.64 1380.49,-2009.64 1393.8,-2009.64 1406.39,-1997.05 1406.39,-1038.46 1402.6,-1034.67 1396.25,-1034.67 v1(1394.35,-1032.77)
B34_L10_P: U3.39 U7.V5 | length 1801.6
  L1 (SIG) w4.11: U3.39@1011.46,-1989.91 1018.35,-1989.91 1021.22,-1987.05 1023.62,-1984.62 1028.82,-1984.62 1039.06,-1994.86 1039.06,-2002.59 1058.9,-2022.43 v1(1061.52,-2022.43) ; U7.V5@1404.86,-962.48 1393.67,-973.67 1393.67,-1013.43 1398.94,-1018.7 1404.72,-1018.7 v1(1406.57,-1020.55)
  L6 (SIG) w3.3: v1(1061.52,-2022.43) 1064.2,-2022.43 1068.69,-2017.94 1185.65,-2017.94 1191.45,-2017.94 ccw(c1191.45,-2002.99) 1206.4,-2002.99 1206.4,-1988.68 cw(c1213.05,-1988.68) 1213.05,-1982.03 cw(c1213.05,-1988.68) 1219.7,-1988.68 1219.7,-2029.93 ccw(c1234.64,-2029.93) 1234.64,-2044.88 ccw(c1234.64,-2029.93) 1249.59,-2029.93 1249.59,-1988.68 cw(c1256.24,-1988.68) 1256.24,-1982.03 cw(c1256.24,-1988.68) 1262.89,-1988.68 1262.89,-2029.93 ccw(c1277.84,-2029.93) 1277.84,-2044.88 ccw(c1277.84,-2029.93) 1292.79,-2029.93 1292.79,-1988.68 cw(c1299.44,-1988.68) 1299.44,-1982.03 cw(c1299.44,-1988.68) 1306.09,-1988.68 1306.09,-2029.93 ccw(c1321.04,-2029.93) 1321.04,-2044.88 ccw(c1321.04,-2029.93) 1335.99,-2029.93 1335.99,-2024.59 cw(c1342.64,-2024.59) 1342.64,-2017.94 1380.49,-2017.94 1397.24,-2017.94 1414.69,-2000.49 1414.69,-1035.02 1408.47,-1028.8 1408.47,-1022.45 v1(1406.57,-1020.55)
B34_L11_N: U3.46 U7.T3 | length 1800.9
  L1 (SIG) w4.11: U3.46@1011.46,-1852.12 1018.35,-1852.12 1021.22,-1854.99 1023.62,-1857.41 1033.2,-1857.41 1042.05,-1866.26 1061.45,-1866.26 1074.84,-1852.87 1074.84,-1847.86 1072.44,-1845.46 1065.63,-1845.46 1061.55,-1849.54 v1(1058.93,-1849.54) ; v1(1328.8,-886.42) U7.T3@1341.87,-899.48
  L6 (SIG) w3.3: v1(1058.93,-1849.54) 1061.61,-1849.54 1065.29,-1845.87 1066.1,-1845.05 1070.31,-1845.05 1077.23,-1851.98 1080.24,-1851.98 cw(c1080.24,-1858.63) 1086.88,-1858.63 1086.88,-1876.78 ccw(c1093.53,-1876.78) 1093.53,-1883.43 ccw(c1093.53,-1876.78) 1100.18,-1876.78 1100.18,-1858.63 cw(c1106.83,-1858.63) 1106.83,-1851.98 1125.38,-1851.98 1240.51,-1851.98 1301.09,-1791.4 1305.95,-1786.54 1305.95,-1738.26 ccw(c1291,-1738.26) 1291,-1723.31 1275.18,-1723.31 cw(c1275.18,-1716.66) 1268.53,-1716.66 cw(c1275.18,-1716.66) 1275.18,-1710.01 1308.79,-1710.01 ccw(c1308.79,-1695.06) 1323.74,-1695.06 ccw(c1308.79,-1695.06) 1308.79,-1680.11 1273.71,-1680.11 cw(c1273.71,-1673.46) 1267.06,-1673.46 cw(c1273.71,-1673.46) 1273.71,-1666.81 1308.79,-1666.81 ccw(c1308.79,-1651.86) 1323.74,-1651.86 ccw(c1308.79,-1651.86) 1308.79,-1636.91 1273.71,-1636.91 cw(c1273.71,-1630.26) 1267.06,-1630.26 cw(c1273.71,-1630.26) 1273.71,-1623.61 1308.79,-1623.61 ccw(c1308.79,-1608.67) 1323.74,-1608.67 ccw(c1308.79,-1608.67) 1308.79,-1593.72 1273.71,-1593.72 cw(c1273.71,-1587.07) 1267.06,-1587.07 cw(c1273.71,-1587.07) 1273.71,-1580.42 1308.79,-1580.42 ccw(c1308.79,-1565.47) 1323.74,-1565.47 ccw(c1308.79,-1565.47) 1308.79,-1550.52 1273.71,-1550.52 cw(c1273.71,-1543.87) 1267.06,-1543.87 cw(c1273.71,-1543.87) 1273.71,-1537.22 1291,-1537.22 ccw(c1291,-1522.27) 1305.95,-1522.27 1305.95,-1494.87 1305.95,-904.66 1315.5,-895.12 1315.5,-887.01 1317.43,-885.08 1327.47,-885.08 v1(1328.8,-886.42)
B34_L11_P: U3.45 U7.R3 | length 1801.8
  L1 (SIG) w4.11: U3.45@1011.46,-1871.8 1018.35,-1871.8 U3.45@1021.22,-1868.94 ; U3.45@1021.22,-1868.92 1023.62,-1866.51 1029.43,-1866.51 1038.28,-1875.36 1065.22,-1875.36 1083.95,-1856.64 1083.95,-1844.09 1076.21,-1836.35 1065.63,-1836.35 1061.55,-1832.26 v1(1058.93,-1832.26) ; v1(1293.9,-883.74) 1313.88,-883.74 1327.64,-869.99 1339.87,-869.99 U7.R3@1341.87,-867.99
  L6 (SIG) w3.3: v1(1058.93,-1832.26) 1061.61,-1832.26 1066.1,-1836.75 1073.75,-1836.75 1080.67,-1843.68 1237.07,-1843.68 1289.35,-1791.4 1297.65,-1783.1 1297.65,-1738.26 ccw(c1291,-1738.26) 1291,-1731.61 1275.18,-1731.61 cw(c1275.18,-1716.66) 1260.23,-1716.66 cw(c1275.18,-1716.66) 1275.18,-1701.71 1308.79,-1701.71 ccw(c1308.79,-1695.06) 1315.44,-1695.06 ccw(c1308.79,-1695.06) 1308.79,-1688.41 1273.71,-1688.41 cw(c1273.71,-1673.46) 1258.76,-1673.46 cw(c1273.71,-1673.46) 1273.71,-1658.51 1308.79,-1658.51 ccw(c1308.79,-1651.86) 1315.44,-1651.86 ccw(c1308.79,-1651.86) 1308.79,-1645.21 1273.71,-1645.21 cw(c1273.71,-1630.26) 1258.76,-1630.26 cw(c1273.71,-1630.26) 1273.71,-1615.32 1308.79,-1615.32 ccw(c1308.79,-1608.67) 1315.44,-1608.67 ccw(c1308.79,-1608.67) 1308.79,-1602.02 1273.71,-1602.02 cw(c1273.71,-1587.07) 1258.76,-1587.07 cw(c1273.71,-1587.07) 1273.71,-1572.12 1308.79,-1572.12 ccw(c1308.79,-1565.47) 1315.44,-1565.47 ccw(c1308.79,-1565.47) 1308.79,-1558.82 1273.71,-1558.82 cw(c1273.71,-1543.87) 1258.76,-1543.87 cw(c1273.71,-1543.87) 1273.71,-1528.92 1291,-1528.92 ccw(c1291,-1522.27) 1297.65,-1522.27 1297.65,-1494.87 1297.65,-901.23 1307.2,-891.68 1307.2,-887.01 1305.27,-885.08 1295.24,-885.08 v1(1293.9,-883.74)
B34_L12_N: U3.42 U7.T4 | length 1808.9
  L1 (SIG) w4.11: U3.42@1011.46,-1930.86 1018.35,-1930.86 1021.22,-1933.73 1023.62,-1936.15 1036.68,-1936.15 1049.58,-1949.06 1052.98,-1949.06 1053.37,-1948.67 1058.37,-1948.67 v1(1060.22,-1946.82) ; v1(1357.62,-915.23) U7.T4@1373.37,-899.48
  L6 (SIG) w3.3: v1(1060.22,-1946.82) 1063.06,-1946.82 1067.55,-1951.31 1075.71,-1951.31 1077.36,-1951.31 ccw(c1077.36,-1944.66) 1084.01,-1944.66 1084.01,-1944.2 cw(c1090.66,-1944.2) 1090.66,-1937.55 cw(c1090.66,-1944.2) 1097.31,-1944.2 1097.31,-1944.66 ccw(c1103.96,-1944.66) 1103.96,-1951.31 1125.69,-1951.31 1356.22,-1951.31 1369.22,-1938.31 1369.22,-1846.19 1369.22,-1818.8 cw(c1384.16,-1818.8) 1384.16,-1803.85 1384.64,-1803.85 ccw(c1384.64,-1797.2) 1391.29,-1797.2 ccw(c1384.64,-1797.2) 1384.64,-1790.55 1365.85,-1790.55 cw(c1365.85,-1775.6) 1350.9,-1775.6 cw(c1365.85,-1775.6) 1365.85,-1760.65 1384.64,-1760.65 ccw(c1384.64,-1754) 1391.29,-1754 ccw(c1384.64,-1754) 1384.64,-1747.35 1365.85,-1747.35 cw(c1365.85,-1732.4) 1350.9,-1732.4 cw(c1365.85,-1732.4) 1365.85,-1717.45 1384.64,-1717.45 ccw(c1384.64,-1710.8) 1391.29,-1710.8 ccw(c1384.64,-1710.8) 1384.64,-1704.15 1365.85,-1704.15 cw(c1365.85,-1689.2) 1350.9,-1689.2 cw(c1365.85,-1689.2) 1365.85,-1674.25 1384.64,-1674.25 ccw(c1384.64,-1667.6) 1391.29,-1667.6 ccw(c1384.64,-1667.6) 1384.64,-1660.95 1365.85,-1660.95 cw(c1365.85,-1646) 1350.9,-1646 cw(c1365.85,-1646) 1365.85,-1631.06 1384.64,-1631.06 ccw(c1384.64,-1624.41) 1391.29,-1624.41 ccw(c1384.64,-1624.41) 1384.64,-1617.76 1365.85,-1617.76 cw(c1365.85,-1602.81) 1350.9,-1602.81 cw(c1365.85,-1602.81) 1365.85,-1587.86 1374.19,-1587.86 ccw(c1374.19,-1581.21) 1380.84,-1581.21 ccw(c1374.19,-1581.21) 1374.19,-1574.56 1373.36,-1574.56 cw(c1373.36,-1559.61) 1358.42,-1559.61 cw(c1373.36,-1559.61) 1373.36,-1544.66 1384.17,-1544.66 ccw(c1384.17,-1538.01) 1390.82,-1538.01 ccw(c1384.17,-1538.01) 1384.17,-1531.36 cw(c1384.16,-1516.41) 1369.22,-1516.41 1369.22,-1466.44 1369.22,-1272.09 1360.78,-1263.66 1360.78,-1067.29 1369.22,-1058.85 1369.22,-926.83 v1(1357.62,-915.23)
B34_L12_P: U3.41 U7.T5 | length 1808.1
  L1 (SIG) w4.11: U3.41@1011.46,-1950.54 1018.35,-1950.54 U3.41@1021.22,-1947.68 ; U3.41@1021.22,-1947.66 1023.62,-1945.25 1032.9,-1945.25 1045.81,-1958.16 1051.67,-1958.16 1057.61,-1964.1 v1(1060.22,-1964.1) ; v1(1389.11,-915.23) U7.T5@1404.86,-899.48
  L6 (SIG) w3.3: v1(1060.22,-1964.1) 1062.91,-1964.1 1067.4,-1959.61 1359.65,-1959.61 1377.52,-1941.75 1377.52,-1846.19 1377.52,-1818.8 cw(c1384.16,-1818.8) 1384.16,-1812.15 1384.64,-1812.15 ccw(c1384.64,-1797.2) 1399.59,-1797.2 ccw(c1384.64,-1797.2) 1384.64,-1782.25 1365.85,-1782.25 cw(c1365.85,-1775.6) 1359.2,-1775.6 cw(c1365.85,-1775.6) 1365.85,-1768.95 1384.64,-1768.95 ccw(c1384.64,-1754) 1399.59,-1754 ccw(c1384.64,-1754) 1384.64,-1739.05 1365.85,-1739.05 cw(c1365.85,-1732.4) 1359.2,-1732.4 cw(c1365.85,-1732.4) 1365.85,-1725.75 1384.64,-1725.75 ccw(c1384.64,-1710.8) 1399.59,-1710.8 ccw(c1384.64,-1710.8) 1384.64,-1695.85 1365.85,-1695.85 cw(c1365.85,-1689.2) 1359.2,-1689.2 cw(c1365.85,-1689.2) 1365.85,-1682.55 1384.64,-1682.55 ccw(c1384.64,-1667.6) 1399.59,-1667.6 ccw(c1384.64,-1667.6) 1384.64,-1652.65 1365.85,-1652.65 cw(c1365.85,-1646) 1359.2,-1646 cw(c1365.85,-1646) 1365.85,-1639.35 1384.64,-1639.35 ccw(c1384.64,-1624.41) 1399.59,-1624.41 ccw(c1384.64,-1624.41) 1384.64,-1609.46 1365.85,-1609.46 cw(c1365.85,-1602.81) 1359.2,-1602.81 cw(c1365.85,-1602.81) 1365.85,-1596.16 1374.19,-1596.16 ccw(c1374.19,-1581.21) 1389.14,-1581.21 ccw(c1374.19,-1581.21) 1374.19,-1566.26 1373.36,-1566.26 cw(c1373.36,-1559.61) 1366.71,-1559.61 cw(c1373.36,-1559.61) 1373.36,-1552.96 1384.17,-1552.96 ccw(c1384.17,-1538.01) 1399.12,-1538.01 ccw(c1384.17,-1538.01) 1384.17,-1523.06 cw(c1384.16,-1516.41) 1377.52,-1516.41 1377.52,-1466.44 1377.52,-1268.65 1369.08,-1260.22 1369.08,-1070.72 1377.52,-1062.29 1377.52,-926.83 v1(1389.11,-915.23)
B34_L13_N: U7.P5
B34_L13_P: U7.N5
B34_L14_N: U7.P3 | length 22.9
  L1 (SIG) w6.41: v1@1325.47,-852.23 v1(1326.12,-852.24) U7.P3@1341.87,-836.49
B34_L14_P: U7.P4
B34_L15_N: U7.R2
B34_L15_P: U7.P2
B34_L16_N: U7.N4
B34_L16_P: U7.M4
B34_L17_N: U1.18 U7.T1 | length 652.1
  L1 (SIG) w5: U7.T1@1278.88,-899.48 1218.05,-899.48 1215.12,-902.41 1215.12,-1111.53 1218.05,-1114.46 1428.22,-1114.46 1445.87,-1132.11 1445.87,-1229.28 1432.69,-1242.46 1410.35,-1242.46 U1.18@1409.93,-1242.87
B34_L17_P: U1.19 U7.R1 | length 681
  L1 (SIG) w5: U7.R1@1278.88,-867.99 1201.72,-867.99 1198.79,-870.92 1198.79,-1120.03 1201.72,-1122.96 1422.63,-1122.96 1433.85,-1134.18 1433.85,-1217.95 1430.33,-1221.46 1411.66,-1221.46 U1.19@1410.08,-1223.04
B34_L18_N: U7.N6
B34_L18_P: U7.M6
B34_L19_N: U7.R5
B34_L19_P: U7.R6
B34_L20_N: U1.16 U7.V6 | length 376.7
  L1 (SIG) w5: U1.16@1409.93,-1282.24 1439.19,-1282.24 1439.37,-1282.42 1470.73,-1251.07 1470.73,-1057.56 1436.36,-1023.19 U7.V6@1436.36,-962.48
B34_L20_P: U1.14 U7.V7 | length 430.8
  L1 (SIG) w5: U1.14@1409.93,-1321.61 1451.86,-1321.61 1495.76,-1277.71 1495.76,-1040.94 1467.85,-1013.03 U7.V7@1467.85,-962.48
B34_L21_N: R24.2 U7.V9 U16.4 | length 660.2
  L1 (SIG) w5: U16.4@1357.11,-1450.62 1357.11,-1427.85 1361.18,-1423.78 1523.93,-1423.78 1536.58,-1411.13 1536.58,-977.8 1530.88,-972.11 1530.88,-962.51 U7.V9@1530.85,-962.48
B34_L21_P: R33.2 U7.U9 U16.3 | length 686.4
  L1 (SIG) w5: U16.3@1372.46,-1441.56 1455.2,-1441.56 1522.75,-1441.56 1534.77,-1441.56 1549.13,-1427.2 1549.13,-977.7 1546.22,-974.79 1546.22,-946.35 U7.U9@1530.85,-930.98
B34_L22_N: U1.15 U7.U6 | length 443.1
  L1 (SIG) w5: U1.15@1409.93,-1301.93 1448.03,-1301.93 1483.24,-1266.71 1483.24,-1049.64 1450.93,-1017.33 1450.93,-945.55 U7.U6@1436.36,-930.98
B34_L22_P: U1.13 U7.U7 | length 494.8
  L1 (SIG) w5: U1.13@1409.93,-1341.3 1456.33,-1341.3 1508.09,-1289.54 1508.09,-1031.26 1483.8,-1006.96 1483.8,-946.92 U7.U7@1467.85,-930.98
B34_L23_N: U1.17 U7.T6 | length 419.6
  L1 (SIG) w5: U1.17@1409.93,-1262.56 1434.85,-1262.56 1457.97,-1239.44 1457.97,-1064.65 1420.61,-1027.29 1420.61,-915.23 U7.T6@1436.36,-899.48
B34_L23_P: U7.R7
B34_L24_N: U7.T8
B34_L24_P: U7.R8
BODY: C51.1 J4.3 J4.4 J5.MH1 J5.MH2 J5.MH3 J5.MH4 J5.MH5 J5.MH6 J5.MH7 J5.MH8 J5.MH9 J5.MH10 J5.MH11 J5.MH12 J5.MH13 J5.MH14 J5.MH15 J5.MH16 J5.MH17 J5.MH18 J5.MH19 J5.MH20 M2.1 M3.1 M4.1 M5.1 R35.1 T1.MP1 T1.MP2 | length 17.6
  L1 (SIG) w20: M5.1@3132.01,0 M5.1@3149.61,0
  other v1: 0.79,-2228.35 79.53,-2228.35 158.27,-2228.35 237.01,-2228.35 315.75,-2228.35 394.49,-2228.35 473.23,-2228.35 551.97,-2228.35 630.71,-2228.35 709.45,-2228.35 788.19,-2228.35 866.93,-2228.35 945.67,-2228.35 1024.41,-2228.35 1103.15,-2228.35 1181.89,-2228.35 1260.63,-2228.35 1339.37,-2228.35 1418.11,-2228.35 1496.85,-2228.35 1575.59,-2228.35 1654.33,-2228.35 1733.07,-2228.35 1811.81,-2228.35 1890.55,-2228.35 1969.29,-2228.35 2048.03,-2228.35 2126.77,-2228.35 2205.51,-2228.35 2284.25,-2228.35 2362.99,-2228.35 2441.73,-2228.35 2520.47,-2228.35 2599.21,-2228.35 2677.95,-2228.35 2756.69,-2228.35 2835.43,-2228.35 2914.17,-2228.35 2992.91,-2228.35 3071.65,-2228.35 3150.39,-2228.35 -102.36,-2125.98 3252.76,-2125.98 -102.36,-2047.24 3251.39,-2030.35 -102.36,-1968.5 3251.39,-1951.61 3251.39,-1872.87 3251.39,-1794.13 3251.39,-1715.39 3251.39,-1636.65 3251.39,-1557.91 3251.39,-1479.17 3251.39,-1400.43 3251.39,-1321.69 2807.7,-1321.28 2886.44,-1321.28 2965.18,-1321.28 3043.92,-1321.28 3122.66,-1321.28 3201.4,-1321.28 2796.19,-1303.13 2796.19,-1224.39 2796.19,-1145.65 2796.19,-1066.91 2796.19,-988.17 2796.19,-909.43 2796.19,-830.69 2796.19,-751.95 2796.19,-673.21 2859.05,-671.92 2937.79,-671.92 3016.53,-671.92 3095.28,-671.92 3174.02,-671.92 3252.76,-671.92 3252.76,-629.92 -102.36,-551.18 3252.76,-551.18 -102.36,-472.44 3252.76,-472.44 -102.36,-393.7 3252.76,-393.7 -102.36,-314.96 3252.76,-314.96 -102.36,-236.22 3252.76,-236.22 -102.36,-157.48 3252.76,-157.48 -102.36,-78.74 3252.76,-78.74 -102.36,0 3252.76,0 0,102.36 78.74,102.36 157.48,102.36 236.22,102.36 314.96,102.36 393.7,102.36 472.44,102.36 551.18,102.36 629.92,102.36 708.66,102.36 787.4,102.36 866.14,102.36 944.88,102.36 1023.62,102.36 1102.36,102.36 1181.1,102.36 1259.84,102.36 1338.58,102.36 1417.32,102.36 1496.06,102.36 1574.8,102.36 1653.54,102.36 1732.28,102.36 1811.02,102.36 1889.76,102.36 1968.51,102.36 2047.25,102.36 2125.99,102.36 2204.73,102.36 2283.47,102.36 2362.21,102.36 2440.95,102.36 2519.69,102.36 2598.43,102.36 2677.17,102.36 2755.91,102.36 2834.65,102.36 2913.39,102.36 2992.13,102.36 3070.87,102.36 3150.39,102.36
DDR3_A0: RN6.5 U7.G3 U8.K3 | length 1416.4
  L1 (SIG) w6.41: v1(624.42,-841.1) U8.K3@641.14,-824.41 ; U7.G3@1341.87,-616.02 1342.86,-616.02 1358.19,-631.36 v1@1358.19,-631.43
  L3 (SIG) w4.7: v1(624.42,-841.1) 624.42,-843.56 627.73,-846.87 627.73,-848.11 713.87,-934.25 1075.82,-934.25 1103.9,-906.17 1103.9,-838.32 1103.9,-825.14 cw(c1111.25,-825.14) 1111.25,-817.79 ccw(c1111.25,-810.44) 1111.25,-803.09 1103.9,-803.09 cw(c1103.9,-795.74) 1103.9,-788.38 1113.48,-788.38 ccw(c1113.48,-781.03) 1113.48,-773.68 1111.25,-773.68 cw(c1111.25,-766.33) 1103.9,-766.33 1103.9,-763.98 1103.9,-615.79 1119.21,-600.47 1296.25,-600.47 1311.9,-616.12 1343.95,-616.12 v1(1359.21,-631.39)
  L8 (SIG) w6.41: RN6.5@495.59,-793.96 495.59,-764.36 504.35,-755.6 549.74,-755.6 ; 549.74,-755.51 576.4,-755.51 609.6,-788.71 609.6,-827.99 622.72,-841.1 v1(624.42,-841.1)
DDR3_A1: RN5.5 U7.J4 U8.L7 | length 1869.7
  L1 (SIG) w6.41: U8.L7@767.12,-855.9 767.12,-856.44 782.04,-871.35 v1(782.04,-871.88) ; v1(1358.6,-693.91) 1358.6,-693.84 U7.J4@1373.37,-679.01 U7.J4@1373.37,-679.01
  L6 (SIG) w4.7: v1(782.04,-871.88) 797.87,-887.71 862.71,-887.71 879.76,-887.71 cw(c879.76,-895.06) 887.12,-895.06 887.12,-904.42 ccw(c894.47,-904.42) 901.82,-904.42 901.82,-893.46 cw(c909.17,-893.46) 916.52,-893.46 916.52,-904.42 ccw(c923.87,-904.42) 931.22,-904.42 931.22,-889.78 cw(c938.57,-889.78) 945.93,-889.78 945.93,-904.42 ccw(c953.28,-904.42) 960.63,-904.42 960.63,-889.78 cw(c967.98,-889.78) 975.33,-889.78 975.33,-904.42 ccw(c982.68,-904.42) 990.03,-904.42 990.03,-889.78 cw(c997.38,-889.78) 1004.73,-889.78 1004.73,-904.42 ccw(c1012.09,-904.42) 1019.44,-904.42 1019.44,-895.06 cw(c1026.79,-895.06) 1026.79,-887.71 1056.3,-887.71 1065.44,-887.71 1080.99,-872.16 1080.99,-853.32 1080.99,-836.27 cw(c1088.34,-836.27) 1088.34,-828.92 1096.71,-828.92 ccw(c1096.71,-821.56) 1096.71,-814.21 1085.42,-814.21 cw(c1085.42,-806.86) 1085.42,-799.51 1096.71,-799.51 ccw(c1096.71,-792.16) 1096.71,-784.81 1087.68,-784.81 cw(c1087.68,-777.46) 1087.68,-770.11 1096.71,-770.11 ccw(c1096.71,-762.76) 1096.71,-755.4 1088.34,-755.4 cw(c1088.34,-748.05) 1080.99,-748.05 1080.99,-730.32 1080.99,-703.44 1120.71,-663.72 1130.79,-663.72 1147.84,-663.72 cw(c1147.84,-671.08) 1155.19,-671.08 1155.19,-676.52 ccw(c1162.55,-676.52) 1169.9,-676.52 1169.9,-662.42 cw(c1177.25,-662.42) 1184.6,-662.42 1184.6,-676.52 ccw(c1191.95,-676.52) 1199.3,-676.52 1199.3,-662.42 cw(c1206.65,-662.42) 1214,-662.42 1214,-676.52 ccw(c1221.36,-676.52) 1228.71,-676.52 1228.71,-671.08 cw(c1236.06,-671.08) 1236.06,-663.72 1264.75,-663.72 1266.99,-665.96 1278.86,-677.83 1342.52,-677.83 v1(1358.6,-693.91)
  L8 (SIG) w6.41: v1(782.04,-871.88) 781.63,-871.47 761.29,-871.47 747.46,-885.3 747.46,-964.59 779.25,-996.37 1011.42,-996.37 1026.8,-980.99 RN5.5@1026.8,-798.09
DDR3_A2: RN6.8 U7.G2 U8.L3 | length 1190
  L1 (SIG) w6.41: v1(620.35,-870.94) 621.76,-869.53 627.51,-869.53 U8.L3@641.14,-855.9 ; v1(1295.32,-631.07) U7.G2@1310.37,-616.02 U7.G2@1310.37,-615.83
  L3 (SIG) w4.7: v1(620.35,-870.94) 710.76,-961.35 852.22,-961.35 983.93,-961.35 1102.89,-961.35 1131.37,-932.87 1131.37,-646.83 1147.13,-631.07 v1(1295.32,-631.07)
  L8 (SIG) w6.41: RN6.8@505.22,-852.38 579.17,-852.38 581.6,-854.8 607.38,-854.8 612.53,-859.95 612.53,-861.13 620.35,-868.95 v1(620.35,-870.94)
DDR3_A3: RN6.7 U7.G6 U8.K2 | length 1320.8
  L1 (SIG) w6.41: v1(594.54,-838.39) 595.1,-838.39 609.08,-824.41 U8.K2@609.64,-824.41 ; v1(1358.51,-600.59) 1420.93,-600.59 U7.G6@1436.36,-616.02
  L6 (SIG) w4.7: v1(594.54,-838.39) 608.76,-824.17 631.46,-824.17 648.51,-824.17 cw(c648.51,-831.52) 655.86,-831.52 655.86,-838.37 ccw(c663.21,-838.37) 670.56,-838.37 670.56,-818.77 cw(c677.92,-818.77) 685.27,-818.77 685.27,-838.37 ccw(c692.62,-838.37) 699.97,-838.37 699.97,-785.08 cw(c707.32,-785.08) 714.67,-785.08 714.67,-816.82 ccw(c722.02,-816.82) 722.02,-824.17 787.83,-824.17 795.7,-816.3 819.12,-792.88 948.91,-792.88 990.31,-751.48 990.31,-641.48 1035.93,-595.86 1157.05,-595.86 1169.93,-582.98 1340.9,-582.98 v1(1358.51,-600.59)
  L8 (SIG) w6.41: RN6.7@495.59,-833.33 520.65,-833.33 526,-838.68 ; 526,-838.39 v1(594.54,-838.39)
DDR3_A4: RN3.7 U7.H4 U8.L8 | length 1393.9
  L1 (SIG) w6.41: U8.L8@798.62,-855.9 798.87,-855.9 814.61,-871.65 v1(814.86,-871.65) ; v1@1358.2,-662.16 1358.51,-662.16 1373.15,-647.52 U7.H4@1373.37,-647.52
  L6 (SIG) w4.7: v1(814.86,-871.65) 830.31,-856.2 877.66,-856.2 880.01,-856.2 ccw(c880.01,-848.84) 887.36,-848.84 887.36,-843.33 cw(c894.71,-843.33) 902.06,-843.33 902.06,-853.28 ccw(c909.41,-853.28) 916.76,-853.28 916.76,-843.33 cw(c924.11,-843.33) 931.47,-843.33 931.47,-866.87 ccw(c938.82,-866.87) 946.17,-866.87 946.17,-843.33 cw(c953.52,-843.33) 960.87,-843.33 960.87,-866.87 ccw(c968.22,-866.87) 975.57,-866.87 975.57,-843.33 cw(c982.92,-843.33) 990.27,-843.33 990.27,-866.87 ccw(c997.63,-866.87) 1004.98,-866.87 1004.98,-843.33 cw(c1012.33,-843.33) 1019.68,-843.33 1019.68,-866.87 ccw(c1027.03,-866.87) 1034.38,-866.87 1034.38,-860.11 cw(c1041.73,-860.11) 1036.54,-854.91 1056.49,-834.95 1058.11,-833.34 1058.11,-821.91 1058.11,-819.55 ccw(c1050.76,-819.55) 1050.76,-812.2 1045.24,-812.2 cw(c1045.24,-804.85) 1045.24,-797.5 1065.44,-797.5 ccw(c1065.44,-790.15) 1065.44,-782.8 1045.24,-782.8 cw(c1045.24,-775.45) 1045.24,-768.1 1065.44,-768.1 ccw(c1065.44,-760.74) 1065.44,-753.39 1045.24,-753.39 cw(c1045.24,-746.04) 1045.24,-738.69 1065.44,-738.69 ccw(c1065.44,-731.34) 1065.44,-723.99 1045.24,-723.99 cw(c1045.24,-716.64) 1045.24,-709.29 1050.76,-709.29 ccw(c1050.76,-701.93) 1058.11,-701.93 1058.11,-674.35 1063.11,-669.35 1085.6,-646.86 1307.77,-646.86 1323.53,-662.62 v1(1357.83,-662.62)
  L8 (SIG) w6.41: v1(814.86,-871.65) 814.86,-870.83 830.78,-854.91 860.31,-854.91 897,-818.22 897,-800.23 RN3.7@899.7,-797.53
DDR3_A5: RN2.5 U7.J2 U8.L2 | length 1437.6
  L1 (SIG) w6.41: v1(595.02,-871.21) 595.02,-870.87 609.64,-856.24 U8.L2@609.64,-855.9 ; v1(1297.65,-692.57) 1297.65,-692.15 1310.37,-679.43 U7.J2@1310.37,-679.01
  L6 (SIG) w4.7: v1(595.02,-871.21) 611.66,-887.86 650.38,-887.86 667.43,-887.86 cw(c667.43,-895.21) 674.78,-895.21 674.78,-972.98 ccw(c682.13,-972.98) 689.48,-972.98 689.48,-885.88 cw(c696.84,-885.88) 704.19,-885.88 704.19,-972.98 ccw(c711.54,-972.98) 718.89,-972.98 718.89,-895.21 cw(c726.24,-895.21) 726.24,-887.86 744.85,-887.86 757.07,-900.08 776.96,-919.98 1094.07,-919.98 1114.5,-899.54 1114.5,-709.84 1132.27,-692.07 1297.16,-692.07 v1(1297.65,-692.57)
  L8 (SIG) w6.41: RN2.5@495.7,-878.5 498.4,-881.2 516.31,-881.2 517.52,-882.41 535.13,-882.41 546.33,-871.21 v1(595.02,-871.21)